# Altium PCB Laser_driver_adj_3A_TTL.PcbDoc
Units mil, origin at the board's own origin, x right, y up, seen from the top; angles counter-clockwise.
Board outline 1929.13 x 1141.73 mil, 2 copper layers (Top Layer, Bottom Layer); 39 components, 24 nets, 101 pads, 20 vias.
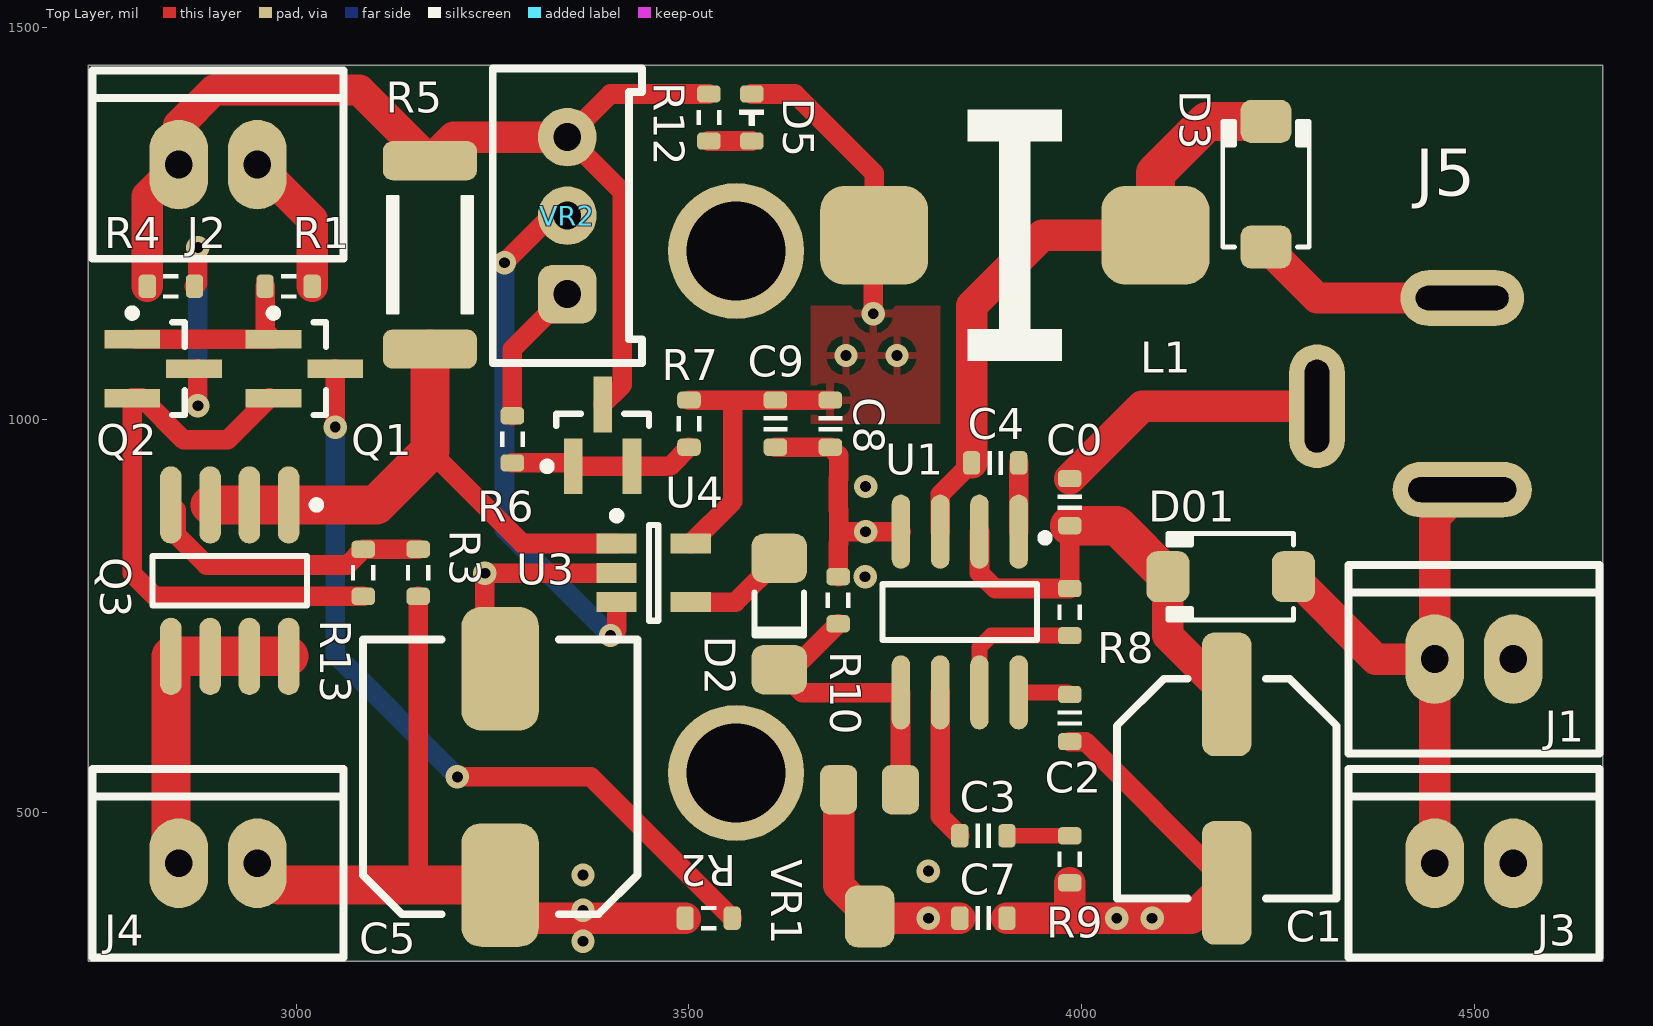
[diagram p0: Top Layer view]
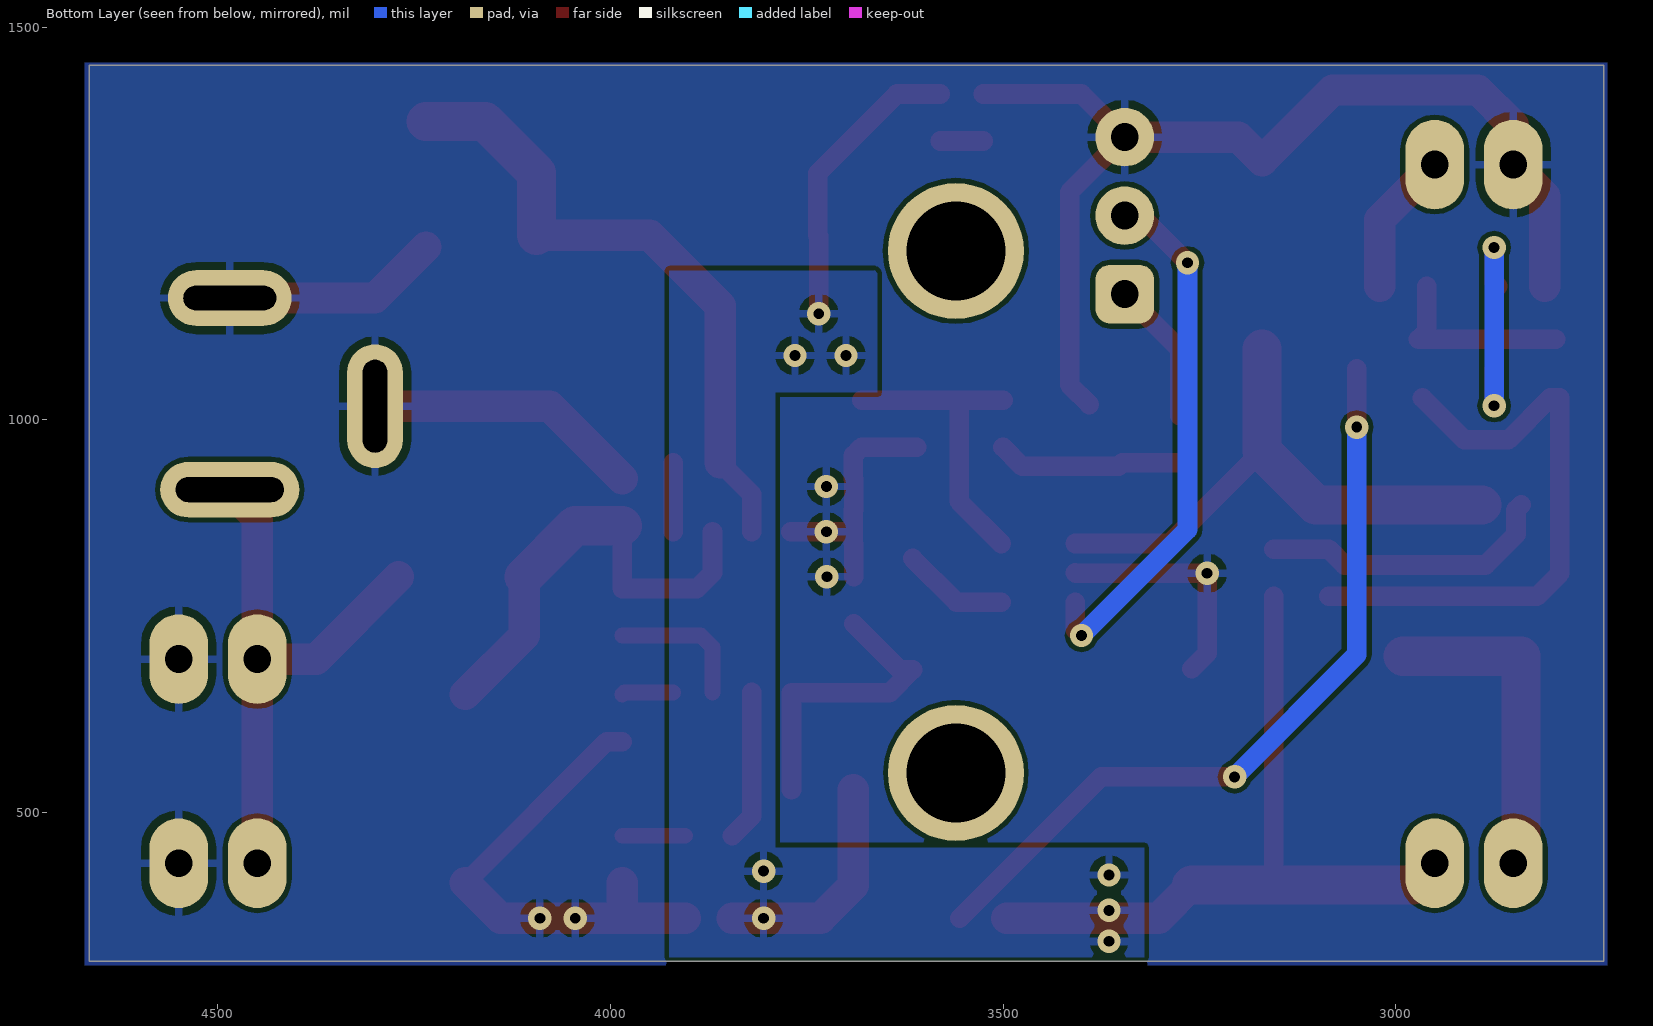
[diagram p1: Bottom Layer view, seen from below]
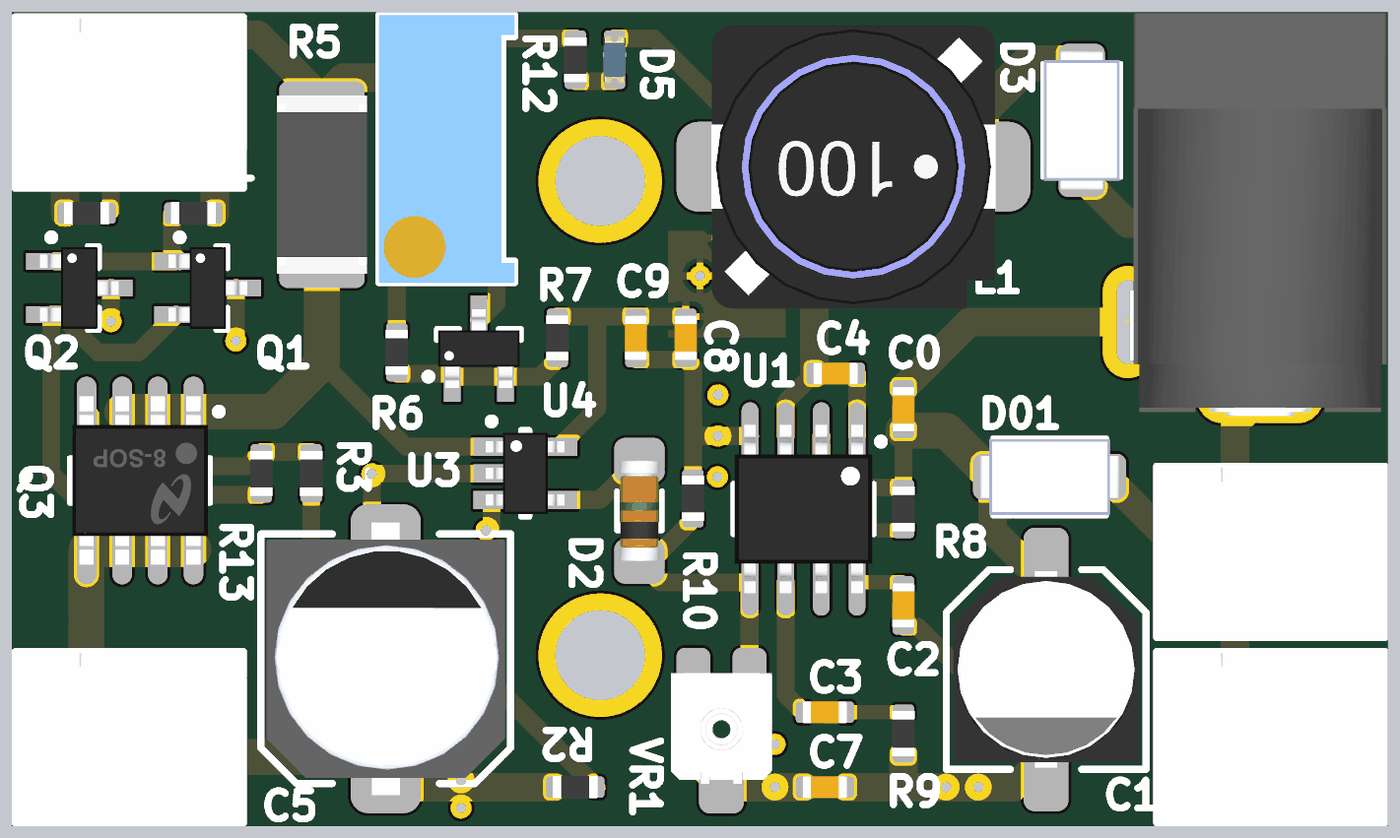
[diagram p2: 3D render of the assembled board from above, using the file's embedded part models]

## Layer stack, top to bottom
Top Solder: solder mask 0.4, Solder Resist, Dk 3.5
Top Layer: signal copper 1.4
Dielectric 1: dielectric 12.6, FR-4, Dk 4.8
Bottom Layer: signal copper 1.4
Bottom Solder: solder mask 0.4, Solder Resist, Dk 3.5

## Board outline
2735,310 2735,1451.73 4664.13,1451.73 4664.13,310

## Design rules (kind name [scope] priority, off if disabled: settings)
Clearance [All] p1: gap=6 ignorepadtopadclearanceinfootprint=FALSE
PolygonConnect [All] p1: connectstyle=Relief reliefconductorwidth=10 reliefentries=4 polygonreliefangle="90 Angle" airgapwidth=10
RoutingVias [All] p1: holewidth=13.78 width=29.78 viastyle="Through Hole" minholewidth=13.78 minwidth=29.78 maxholewidth=100 maxwidth=200
SolderMaskExpansion [All] p1: expansion=4
Width [All] p1: maxlimit=10000 minlimit=6 preferedwidth=10 minimp=50.000000 maximp=50.000000 favimp=50.000000
30 further rules are at their usual default settings.

## Components (designator, comment, footprint, x,y, rotation, side; value= is the part's Value field where it differs from the comment)
C0 "Cap" CAP_0603 3985,895 r90 top value=?F
C1 "Cap_P" CAP_PR_SMD_6.3 4185,530 r90 top value=220uF
C2 "Cap" CAP_0603 3985,620 r270 top value=?F
C3 "Cap" CAP_0603 3875,470 r0 top value=?F
C4 "Cap" CAP_0603 3890,945 r180 top value=?F
C5 "Cap_P" CAP_PR_SMD_8.3 3259.5,545 r270 top value=470uF
C7 "Cap" CAP_0603 3875,365 r180 top value=?F
C8 "Cap" CAP_0603 3680,995 r90 top value=?F
C9 "Cap" CAP_0603 3610,995 r90 top value=?F
D01 "=value" DO-214AC 4190,800 r180 top
D2 "1N4148" SOD-80/MLL34 3615,752.5 r270 top
D3 "=value" DO-214AC 4235,1300 r90 top
D5 "G" LED_0603 3580,1385 r270 top
J1 "CON_XH2.54_2" XH2.54_2 4500,695 r180 top
J2 "CON_XH2.54_2" XH2.54_2 2900,1325 r180 top
J3 "CON_XH2.54_2" XH2.54_2 4500,435 r180 top
J4 "CON_XH2.54_2" XH2.54_2 2900,435 r180 top
J5 "DC_Power_Jack" DC005 4485,1155 r0 top
L1 "Ind" IND_SLF10145 3915,1235 r180 top value=100uH
Q1 "NPN" SOT23-3M 3010,1065 r0 top
Q2 "PNP" SOT23-3M 2830,1065 r0 top
Q3 "RSS100N003" SOP8_M 2915,795 r270 top
R1 "Res" RES_0603 2990,1170 r0 top value=810
R2 "Res" RES_0603 3525,365 r180 top value=810
R3 "Res" RES_0603 3155,805 r270 top value=203
R4 "Res" RES_0603 2840,1170 r0 top value=810
R5 "Res" RES_2512M 3170,1210 r270 top value=R010
R6 "Res" RES_0603 3275,975 r270 top value=473
R7 "Res" RES_0603 3500,995 r270 top value=810
R8 "Res" RES_0603 3985,755 r90 top value=104
R9 "Res" RES_0603 3985,440 r90 top value=682
R10 "Res" RES_0603 3690,770 r270 top value=512
R12 "Res" RES_0603 3525.3,1385 r90 top value=810
R13 "Res" RES_0603 3085,805 r270 top value=101
U1 "MP1484" SOIC8N 3845,755 r270 top
U3 "LMV321" SOT23-5AM 3455,805 r0 top
U4 "TL432" SOT23-3M 3390,980 r90 top
VR1 "VR" RES_VR_EVM3G/E 3730,450 r180 top value=502
VR2 "VR" RES_VR_3296W 3345,1260 r90 top value=502

## Footprints (in the part's own frame and the unit in brackets; to place one, negate y for a bottom-side part, rotate by r counter-clockwise, add the part's x,y. Pads: shape width x height; smd on the part's side, far side on the other; paste and mask are expansions set on the pad)
CAP_0603 [mil]
  rrect50% 22x30 smd: 1(-30,0) 2(30,0)
  silkscreen extent -10,-15 10,15, body extent -31,-16 31,16, height 31
CAP_PR_SMD_6.3 [mm]
  rrect50% 4x1.6 smd: 1(3.05,0) 2(-3.05,0)
  silkscreen extent -3.56,-3.56 3.56,3.56, body extent -3.5,-3.3 3.5,3.3, height 8.11
CAP_PR_SMD_8.3 [mm]
  rrect50% 4x2.5 smd: 1(3.5,0) 2(-3.5,0)
  silkscreen extent -4.45,-4.45 4.45,4.45, body extent -4.85,-4.25 4.85,4.25, height 10.3
DC005 [mm]
  oval 4x1.8 hole 0.8 slot 3 at 0 deg: 1(0,0)
  oval 1.8x4 hole 0.8 slot 3 at 90 deg: 2(-4.7,-3.5)
  oval 4.5x1.8 hole 0.8 slot 3.5 at 0 deg: 3(0,-6.2)
  body extent -4.65,-6.85 4.5,7.5, height 11
DO-214AC [mil] "SMA"
  rrect50% 55x65 smd: 1(-80,0) 2(80,0)
  silkscreen extent -80,-55 80,55, body extent -98,-53 98,53, height 85
IND_SLF10145 [mm]
  rrect50% 3.5x3.2 smd: 1(-4.55,0) 2(4.55,0)
  silkscreen extent -1.52,-4.06 1.52,4.06, body extent -5.06,-5.05 5.06,5.05, height 4.5
LED_0603 [mil]
  rrect50% 22x30 smd: 1(-30,0) 2(30,0)
  silkscreen extent -10,-16 10,16, body extent -32,-16 32,16, height 24
RES_0603 [mil]
  rrect50% 22x30 smd: 1(-30,0) 2(30,0)
  silkscreen extent -10,-16 10,16, body extent -31,-16 31,16, height 18
RES_2512M [mil]
  rrect50% 50x120 smd: 1(-120,0) 2(120,0)
  silkscreen extent -75,-55 75,55, body extent -125,-63 125,63, height 19
RES_VR_3296W [mm]
  rrect50% 1.9x1.9 hole 0.9: 1(-2.54,0)
  round 1.9 hole 0.9: 2(0,0) 3(2.54,0)
  silkscreen extent -4.76,-2.41 4.76,2.41, body extent -4.77,-2.42 4.76,2.41, height 11.63
RES_VR_EVM3G/E [mm]
  rrect50% 1.2x1.6 smd: 1(-1,-2) 3(1,-2)
  rrect50% 1.6x2 smd: 2(0,2.1)
  body extent -1.8,-1.91 1.8,2.05, height 1.13
SOD-80/MLL34 [mm] "Metal Electrode Face (MELF) Diode; Body 3.5 x 1.7 mm (LxDia)"
  rrect50% 1.6x1.8 smd: 1(-1.8,0) 2(1.8,0)
  silkscreen extent -0.7,-0.8 0.7,0.8, body extent -1.8,-0.75 1.8,0.75, height 1.5
SOIC8N [mm] "SOIC, 8-Leads, Body 4.9x3.9mm, Pitch 1.27mm, IPC Medium Density"
  oval 2.4x0.6 smd: 1(-2.6,1.905) 2(-2.6,0.635) 3(-2.6,-0.635) 4(-2.6,-1.905) 5(2.6,-1.905) 6(2.6,-0.635) 7(2.6,0.635) 8(2.6,1.905)
  silkscreen extent -2.52,-2.5 0.9,2.88, body extent -3,-2.45 3,2.45, height 1.75
SOP8_M [mm] "SOIC, 8-Leads, Body 4.9x3.9mm, Pitch 1.27mm, IPC Low Density"
  oval 2.5x0.7 smd: 1(-2.45,1.905) 2(-2.45,0.635) 3(-2.45,-0.635) 4(-2.45,-1.905) 5(2.45,-1.905) 6(2.45,-0.635) 7(2.45,0.635) 8(2.45,1.905)
  silkscreen extent -2.57,-2.5 0.8,2.93, body extent -3,-2.41 3,2.41, height 1.7
SOT23-3M [mm] "SOT23, 3-Leads, Body 2.9x1.3mm, Pitch 0.95mm, Lead Span 2.5mm, IPC Low Density"
  rect 1.8x0.6 smd: 1(-1,0.95) 2(-1,-0.95) 3(1,0)
  silkscreen extent -1.12,-1.5 0.7,1.92, body extent -1.4,-1.45 1.4,1.45, height 1.3
SOT23-5AM [mm] "SOT23, 5-Leads, Body 2.9x1.7mm, Pitch 0.95mm, Lead Span 2.8mm, IPC Low Density"
  rect 1.3x0.65 smd: 1(-1.2,0.95) 2(-1.2,0) 3(-1.2,-0.95) 4(1.2,-0.95) 5(1.2,0.95)
  silkscreen extent -1.32,-1.55 0.15,1.97, body extent -1.4,-1.45 1.4,1.45, height 1.45
XH2.54_2 [mm]
  oval 1.9x2.9 hole 0.9: 1(-1.27,0) 2(1.27,0)
  silkscreen extent -4.06,-3.05 4.06,3.05, body extent -4,-3 4,3, height 7

## Part data
D01 D3: library part SchottkyDiode, "Schottky Diode"
D2: library part Diode, "Diode", Type=SMA
D5: library part LED, "LED"
L1: "Inductor", Specification="±5% 100mA"
Q1: "NPN General Purpose Amplifier", ComponentLink1Description="Manufacturer Link", ComponentLink1URL=http://www.fairchildsemi.com/, ComponentLink2Description=Datasheet, ComponentLink2URL=http://www.fairchildsemi.com/ds/2N%2F2N3904.pdf, DatasheetVersion=1997, LatestRevisionDate=15-Jan-2003, LatestRevisionNote="PCB Footprint 'BCY-W3/D4.7' replaced", PackageDescription="TO, Flat Index; 3 In-Line, Axial Leads; Body Dia. 4.5mm; Leads 0.51 x 0.48 mm (max)", PackageReference=TO-92A, PackageVersion=Sep-1998, Published=8-Jun-2000, Publisher="Altium Limited"
Q2: "PNP General Purpose Amplifier", ComponentLink1Description="Manufacturer Link", ComponentLink1URL=http://www.fairchildsemi.com/, ComponentLink2Description=Datasheet, ComponentLink2URL=http://www.fairchildsemi.com/ds/2N%2F2N3906.pdf, DatasheetVersion=1997, LatestRevisionDate=15-Jan-2003, LatestRevisionNote="PCB Footprint 'BCY-W3/D4.7' replaced", PackageDescription="TO, Flat Index; 3 In-Line, Axial Leads; Body Dia. 4.5mm; Leads 0.51 x 0.48 mm (max)", PackageReference=TO-92A, PackageVersion=Sep-1998, Published=8-Jun-2000, Publisher="Altium Limited"
U1: "? 3A Continuous Output Current / ? Wide 4.75V to 18V Operating Input Range / ? Integrated 85m? Power MOSFET Switches / ? Output Adjustable from 0.925V to 20V / ? Up to 95% Efficiency / ? Programmable Soft-Start / ? Stable with Low ESR Ceramic Output Capacitors / ? Fixed 340KHz Frequency / ? Cycle-by-Cycle Over Current Protection / ? Input Under Voltage Lockout / ? Thermally Enhanced 8-Pin SOIC Package"
VR1 VR2: library part Res_VR, "Resistor Variable", Specification=±5%

## Free pads (board coordinates)
  round 173.23 hole 125.98 unplated: C(3560,1215) C(3560,550)

## Via types
v1: diameter 29.76, hole 13.78, Top Layer to Bottom Layer, 20 vias

## Nets (pads, with @x,y where several pads share a name; then routed paths per layer and width w, separated by ;. In a path a pad name is that pad's centre, name@x,y a point inside that pad or via, vN(x,y) a via of type N, cw(c..) or ccw(c..) an arc to the next point about the centre after c; other vN are vias at no path point)
+12: D01.1 J1.2 J3.2 J5.3 | length 713.9
  Top Layer w40: D01.1 4375,695 J1.2 ; J3.2 J1.2 ; J5.3 4450,875.91 J1.2
FB: D2.2 R10.2 U1.5 VR1.1 | length 389.1
  Top Layer w25: R10.2 3631.63,681.63 D2.2 3644.63,652.01 3769.37,652.01 VR1.1
GND: C0.2 C1.2 C2.2 C5.2 C7.1 C8.1 C9.1 D3.1 J1.1 J2.2 J3.1 J5.1 J5.2 R4.1 R5.1 R9.1 R10.1 R12.2 U1.4 U3.2 U4.3 VR2.3 | length 3234.3
  Top Layer w25: C5.2 3240,702.3 v1(3240,804.37) 3407.13,804.37 U3.2 ; U4.3 3415,1044.37 3415,1290 VR2.3 3400,1415 R12.2 ; C9.1 C8.1 3690.63,954.37 3690.63,925 3690.29,924.66 3690.29,884.96 3690.63,884.62 3690.63,860 ; R10.1 3690,841.77 3690.63,842.4 3690.63,860 ; U1.4 v1(3725,857.36) 3693.27,857.36 3690.63,860 ; C2.2 4004.92,590 C1.2
  Top Layer w40: R4.1 2810,1285 J2.2 2850,1375 2895,1420 3080,1420 R5.1 3200,1360 VR2.3 ; C7.1 3985,365 ; R9.1 3985,365 ; C0.2 4077.2,1017.2 J5.2 ; C1.2 4140.08,365 v1(4090,365) v1(4045,365) 3985,365 ; D3.1 4300,1155 J5.1
  other v1: 3724.37,800 3725,915
LD+: C5.1 C7.2 C8.2 C9.2 D5.1 J4.1 L1.2 R2.2 R3.2 R7.1 U3.5 VR1.2 VR1.3 | length 1997.9
  Top Layer w25: 3155,407.2 R3.2 ; R7.1 3555,1025 ; U3.5 3555.9,896.06 3555.9,1024.1 3555,1025 ; D5.1 3635,1415 3735.87,1314.13 L1.2 3734.71,1233.84 v1(3734.71,1135) ; C8.2 C9.2 3555,1025
  Top Layer w40: C5.1 3301.7,365 R2.2 ; VR1.3 3690.63,406.69 VR1.2 3732.32,365 v1(3805,365) C7.2
  Top Layer w50: J4.1 2977.8,407.2 3155,407.2 C5.1
  other v1: 3365,335.63 3365,375 3365,420 3805,425 3700,1081.86 3765,1081.86
LD-: J4.2 Q3.5 Q3.6 Q3.7 Q3.8 | length 417.7
  Top Layer w50: J4.2 2840,445 Q3.5 Q3.6 Q3.7 Q3.8
NetC0_1: C0.1 C1.1 D01.2 R8.2 U1.2 | length 588.6
  Top Layer w25: U1.2 3870,805 3890,785 R8.2 C0.1
  Top Layer w40: D01.2 4110,725.08 C1.1
  Top Layer w50: C0.1 4045,865 D01.2
NetC2_1: C2.1 U1.8 | length 66.1
  Top Layer w20: U1.8 3982.36,652.64 C2.1
NetC3_1: C3.1 U1.6 | length 193
  Top Layer w25: U1.6 3820,495 C3.1
NetC3_2: C3.2 R9.2 | length 80
  Top Layer w20: C3.2 R9.2
NetC4_1: C4.1 U1.1 | length 87.6
  Top Layer w25: U1.1 C4.1
NetC4_2: C4.2 D3.2 L1.1 U1.3 | length 822.9
  Top Layer w25: U1.3 3820,905 C4.2
  Top Layer w40: C4.2 3860,1145 3950,1235 L1.1
  Top Layer w50: L1.1 4094.13,1314.13 4160,1380 D3.2
NetD2_1: D2.1 U3.4 | length 135.9
  Top Layer w25: U3.4 3559.23,767.6 D2.1
NetD5_2: D5.2 R12.1 | length 54.7
  Top Layer w25: R12.1 D5.2
NetQ1_B: Q1.1 Q2.1 R1.1 | length 242
  Top Layer w25: Q2.1@2795.63,1102.4 Q1.1@2965.63,1102.4 ; R1.1 2960,1113.03 Q1.1
NetQ1_C: Q1.3 R2.1 | length 1009
  Top Layer w25: v1(3049.37,990.63) Q1.3 ; v1(3205,545) 3375,545 R2.1
  Bottom Layer w25: v1(3049.37,990.63) 3049.37,700.63 v1(3205,545)
NetQ1_E: Q1.2 Q2.2 R13.2 | length 743.9
  Top Layer w25: Q2.2 2790.63,804.37 2820,775 R13.2 ; Q2.2@2795.63,1027.6 2803.09,1027.6 2856.35,974.33 2912.37,974.33 Q1.2@2965.63,1027.6
NetQ2_C: Q2.3 R4.2 | length 299.9
  Top Layer w25: R4.2 2874.37,1174.37 v1(2874.37,1219.37) ; v1(2874.37,1017.83) Q2.3@2874.37,1065
  Bottom Layer w25: v1(2874.37,1017.83) v1(2874.37,1219.37)
NetQ3_G: Q3.4 R3.1 R13.1 | length 373.2
  Top Layer w25: Q3.4 2846.5,884.96 2846.5,853.87 2885.37,815 3065,815 R13.1 R3.1
NetQ3_S: Q3.1 Q3.2 Q3.3 R5.2 U3.1 | length 724.9
  Top Layer w25: 3170,960 3287.6,842.4 U3.1
  Top Layer w50: Q3.3 Q3.2 Q3.1 3101.46,891.46 3170,960 R5.2
NetR6_1: R6.1 VR2.1 | length 184
  Top Layer w25: R6.1 3275,1090 VR2.1
NetR6_2: R6.2 R7.2 U4.1 U4.2 | length 236.9
  Top Layer w25: R6.2 3348.23,945 U4.1 U4.2 3475.63,940.63 R7.2
NetR8_1: R8.1 U1.7 | length 178.6
  Top Layer w20: U1.7 3870,710 3885,725 R8.1
NetU3_3: U3.3 VR2.2 | length 681.4
  Top Layer w25: v1(3265,1200) 3325,1260 VR2.2 ; v1(3400,725.08) 3407.76,732.83 U3.3
  Bottom Layer w25: v1(3265,1200) 3265,860.08 v1(3400,725.08)
TTL: J2.1 R1.2 | length 184
  Top Layer w40: J2.1 3020,1255 R1.2

## Polygon pours and split planes (outlines as drawn)
GND on Bottom Layer "GND" (solid, pour order 12): 2730,1455 2730,305 4670,305 4670,1455
GND on Bottom Layer "GND" (solid, pour order 8): 3825,1030
LD+ on Bottom Layer "GND" (solid, pour order 4): 3660,1190.15 3925,1189.87 3925,315 3320,315 3320,455 3790,455 3790,1035 3660,1035
GND on Bottom Layer "GND" (solid, pour order 2): 4990,795
LD+ on Top Layer "GND" (solid, pour order 10): 3655,1145 3820,1145 3820,995 3655,995

## Silkscreen, mask and mechanical layers (free items; w line width, h text height)
Mechanical 1:
  the board outline again, w10